# Allegro board ACU9EG.brd
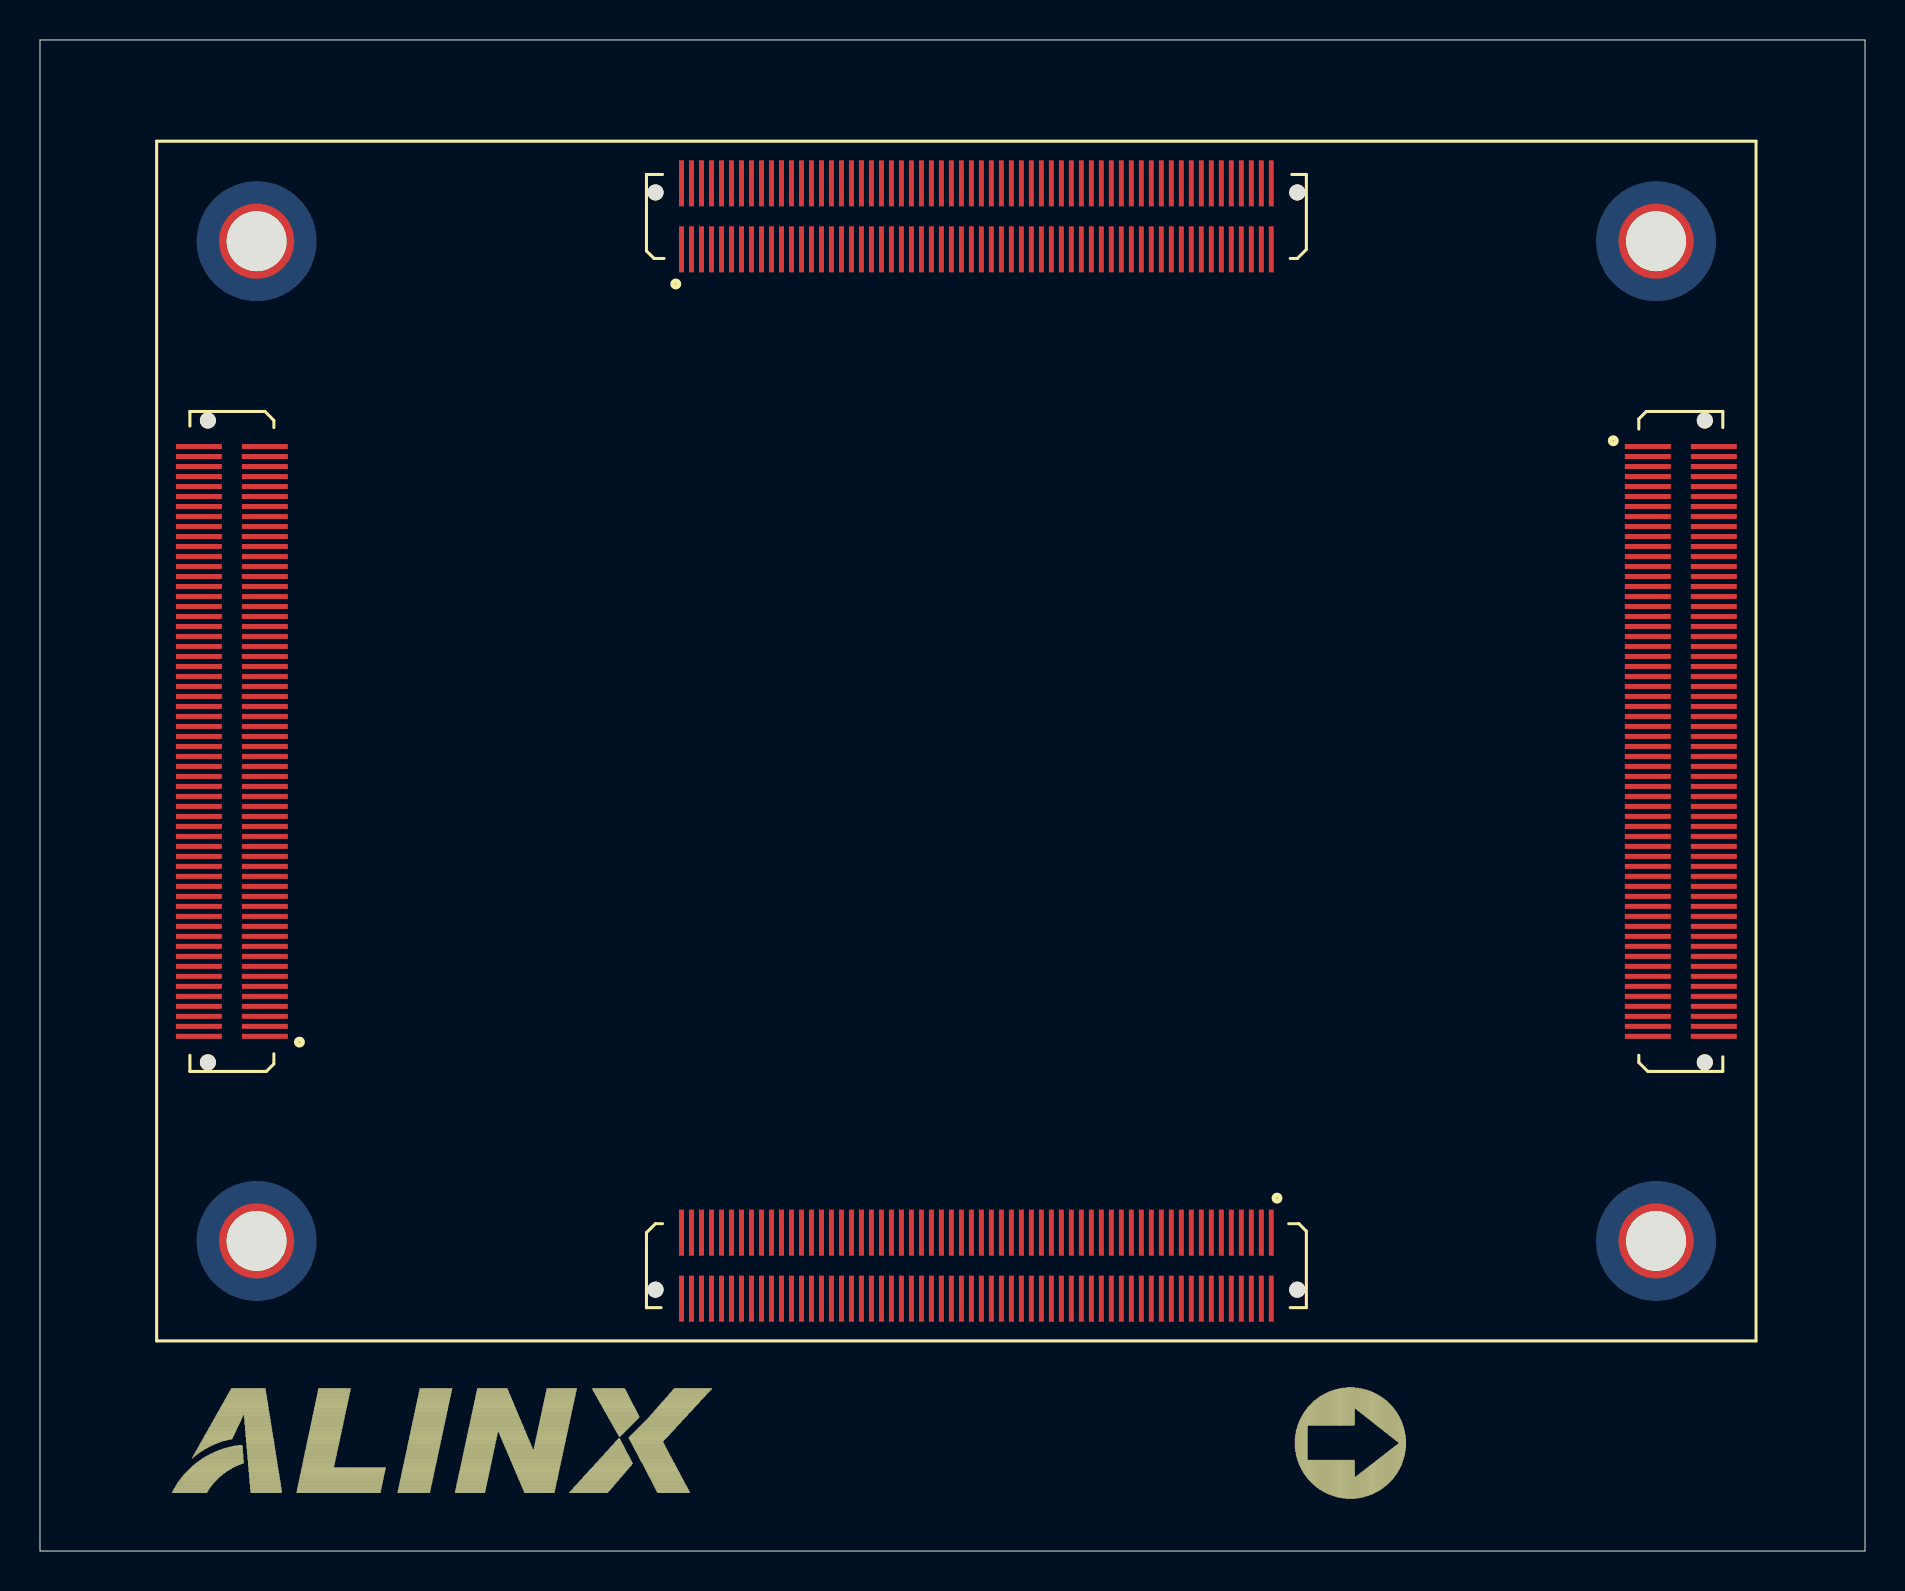
[diagram p0: board, top side]
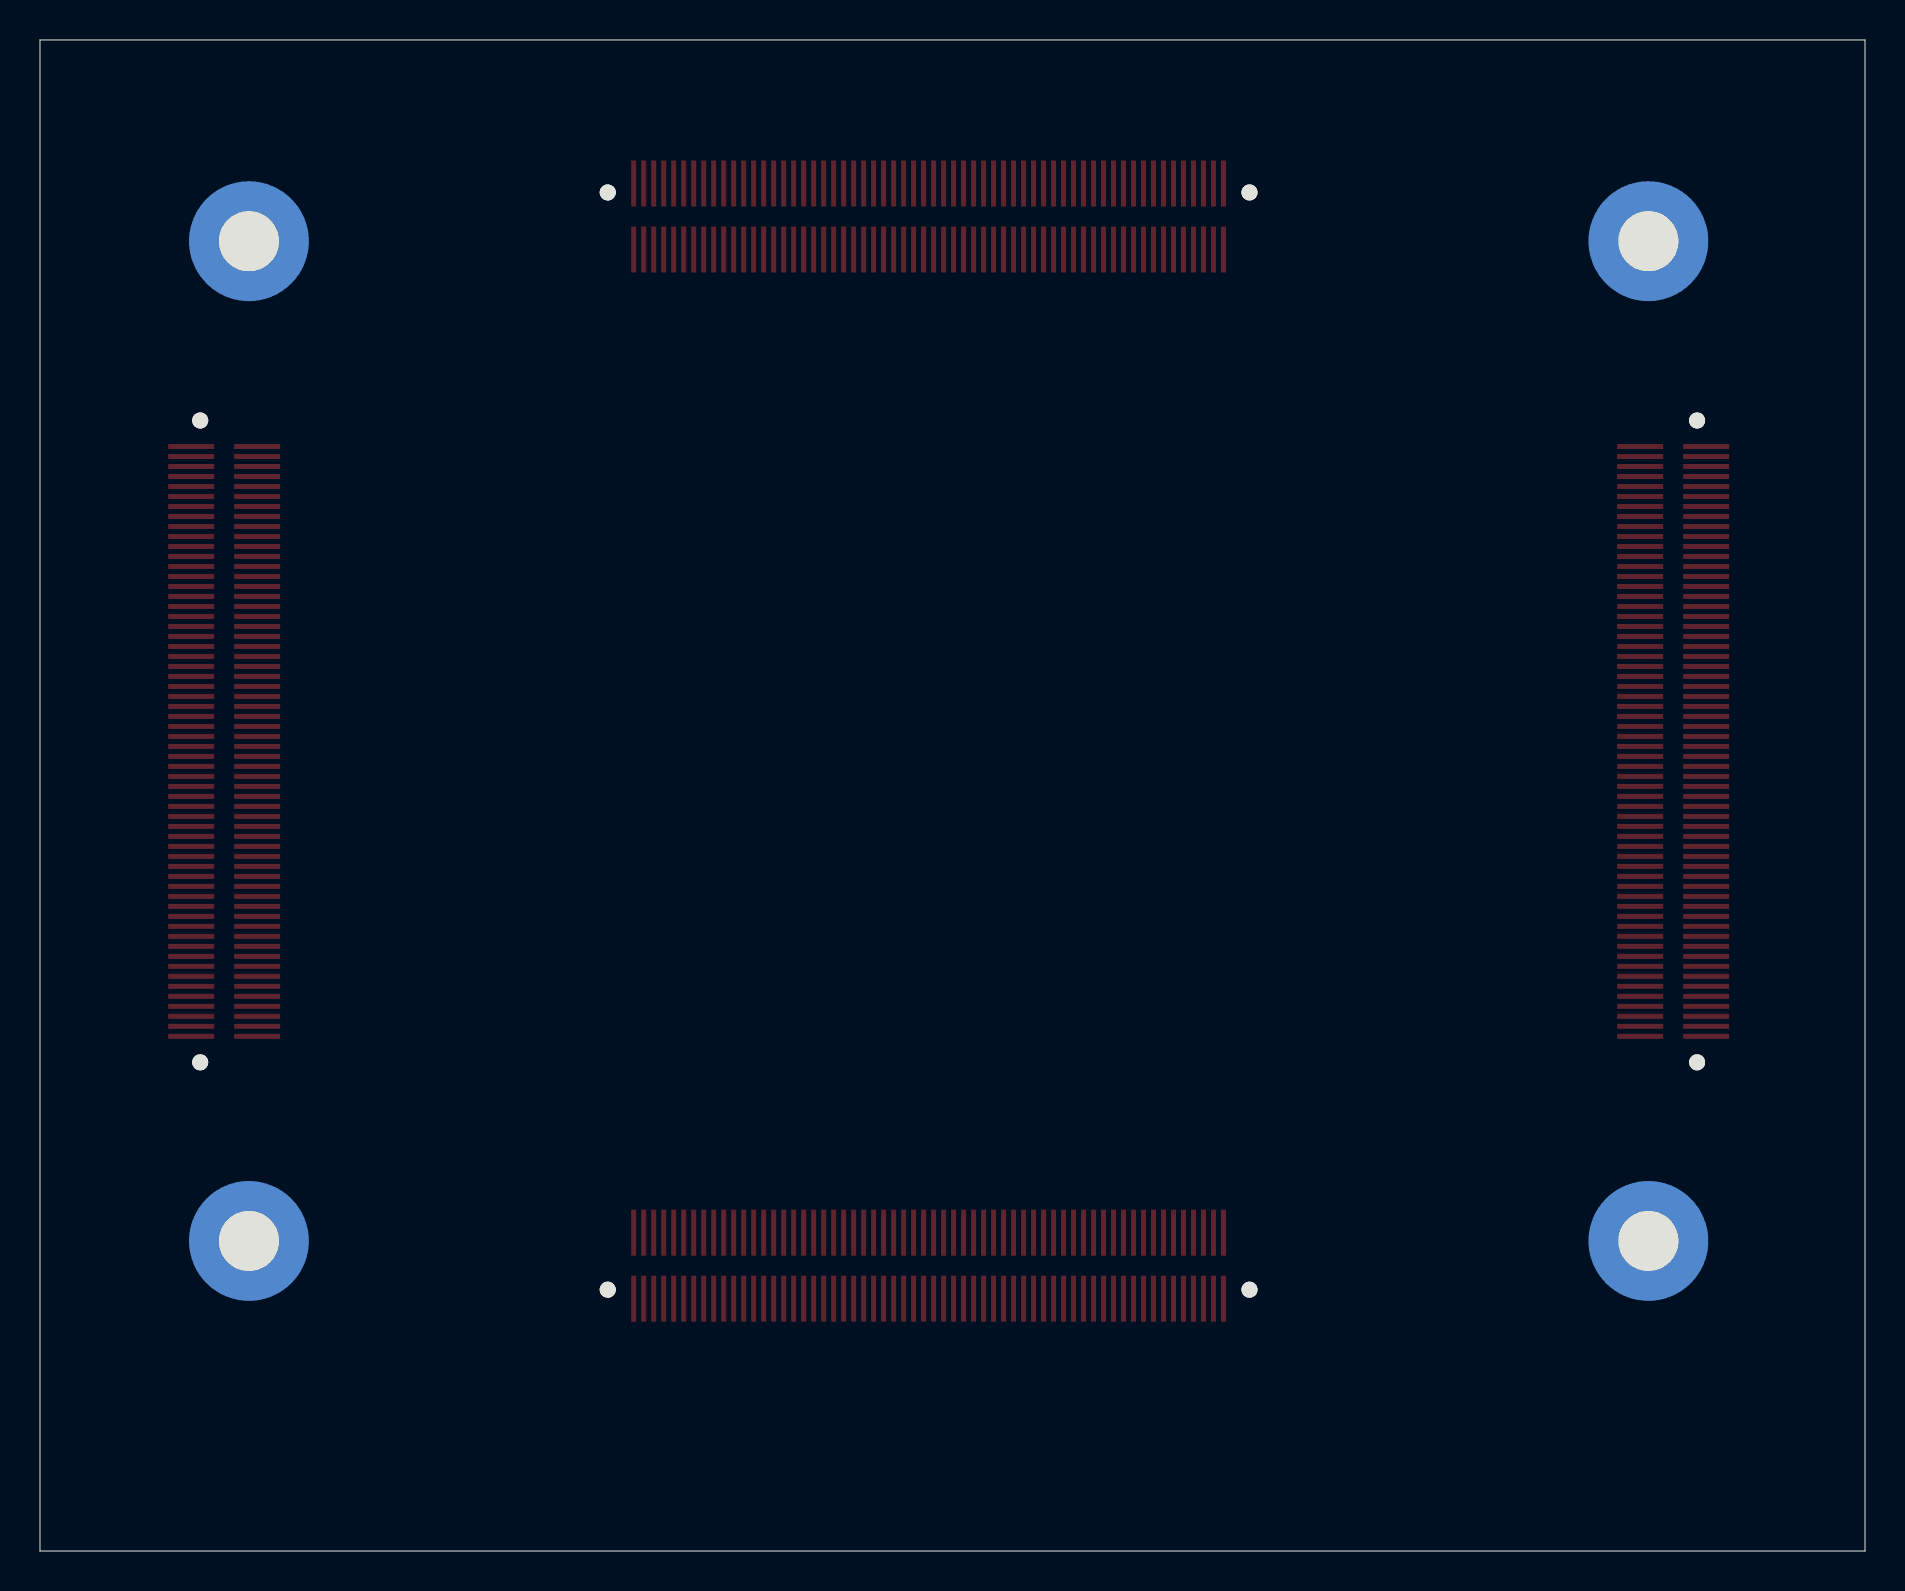
[diagram p1: board, bottom side, seen from below]

Outline 91.29 x 75.57 mm; copper layers: TOP, L2_GND, L3, L4_GND, L5_POW, L6, L7_GND, BOTTOM. Coordinates in mm from the lower left corner of the outline.
Outline path: 0,75.57 0,0 91.29,0 91.29,75.57 0,75.57

## Design rules (mm)
constraint set DEFAULT: min track width 0.114
net group 128_CLK0: nets 128_CLK0_N 128_CLK0_P
net group 128_RX0_: nets 128_RX3_N 128_RX3_P
net group 485_1: nets 485_A1 485_B1
net group 505_DP_CLK: nets 505_DP_CLKN 505_DP_CLKP
net group 505_PCIE_REFCLK_: nets 505_PCIE_REFCLK_N 505_PCIE_REFCLK_P
net group 505_USB_CLK: nets 505_USB_CLKN 505_USB_CLKP
net group DIFFPAIR47: nets TXN_DS3_C TXP_DS3_C
net group DIFFPAIR51: nets RX_DS3_N RX_DS3_P
net group DIFFPAIR53: nets RX_DS1_N RX_DS1_P
net group DIFFPAIR54: nets RX_DS4_N RX_DS4_P
net group DIFFPAIR56: nets RX_DS2_N RX_DS2_P
net group DIFFPAIR71: nets N16921766 N16921769
net group DPAUX_: nets DPAUX_N DPAUX_P
net group FMC_CLK0_: nets FMC_CLK0_N FMC_CLK0_P
net group FMC_CLK1_: nets FMC_CLK1_N FMC_CLK1_P
net group FMC_DP0_C2M_: nets FMC_DP0_C2M_N FMC_DP0_C2M_P
net group FMC_DP0_M2C_: nets FMC_DP0_M2C_N FMC_DP0_M2C_P
net group FMC_DP1_C2M: nets FMC_DP1_C2M_N FMC_DP1_C2M_P
net group FMC_DP1_M2C: nets FMC_DP1_M2C_N FMC_DP1_M2C_P
net group FMC_DP2_C2M: nets FMC_DP2_C2M_N FMC_DP2_C2M_P
net group FMC_DP2_M2C: nets FMC_DP2_M2C_N FMC_DP2_M2C_P
net group FMC_DP3_C2M: nets FMC_DP3_C2M_N FMC_DP3_C2M_P
net group FMC_DP3_M2C: nets FMC_DP3_M2C_N FMC_DP3_M2C_P
net group FMC_DP4_C2M: nets FMC_DP4_C2M_N FMC_DP4_C2M_P
net group FMC_DP4_M2C: nets FMC_DP4_M2C_N FMC_DP4_M2C_P
net group FMC_DP5_C2M: nets FMC_DP5_C2M_N FMC_DP5_C2M_P
net group FMC_DP5_M2C: nets FMC_DP5_M2C_N FMC_DP5_M2C_P
net group FMC_DP6_C2M: nets FMC_DP6_C2M_N FMC_DP6_C2M_P
net group FMC_DP6_M2C: nets FMC_DP6_M2C_N FMC_DP6_M2C_P
net group FMC_DP7_C2M: nets FMC_DP7_C2M_N FMC_DP7_C2M_P
net group FMC_DP7_M2C: nets FMC_DP7_M2C_N FMC_DP7_M2C_P
net group FMC_GBTCLK0_M2C_: nets FMC_GBTCLK0_M2C_N FMC_GBTCLK0_M2C_P
net group FMC_GBTCLK1_M2C: nets FMC_GBTCLK1_M2C_N FMC_GBTCLK1_M2C_P
net group FMC_LA00_CC_: nets FMC_LA00_CC_N FMC_LA00_CC_P
net group FMC_LA01_CC_: nets FMC_LA01_CC_N FMC_LA01_CC_P
net group FMC_LA02_: nets FMC_LA02_N FMC_LA02_P
net group FMC_LA03_: nets FMC_LA03_N FMC_LA03_P
net group FMC_LA04_: nets FMC_LA04_N FMC_LA04_P
net group FMC_LA05_: nets FMC_LA05_N FMC_LA05_P
net group FMC_LA06_: nets FMC_LA06_N FMC_LA06_P
net group FMC_LA07_: nets FMC_LA07_N FMC_LA07_P
net group FMC_LA08_: nets FMC_LA08_N FMC_LA08_P
net group FMC_LA09_: nets FMC_LA09_N FMC_LA09_P
net group FMC_LA10_: nets FMC_LA10_N FMC_LA10_P
net group FMC_LA11_: nets FMC_LA11_N FMC_LA11_P
net group FMC_LA12_: nets FMC_LA12_N FMC_LA12_P
net group FMC_LA13_: nets FMC_LA13_N FMC_LA13_P
net group FMC_LA14_: nets FMC_LA14_N FMC_LA14_P
net group FMC_LA15_: nets FMC_LA15_N FMC_LA15_P
net group FMC_LA16_: nets FMC_LA16_N FMC_LA16_P
net group FMC_LA17_CC_: nets FMC_LA17_CC_N FMC_LA17_CC_P
net group FMC_LA18_CC_: nets FMC_LA18_CC_N FMC_LA18_CC_P
net group FMC_LA19_: nets FMC_LA19_N FMC_LA19_P
net group FMC_LA20_: nets FMC_LA20_N FMC_LA20_P
net group FMC_LA21_: nets FMC_LA21_N FMC_LA21_P
net group FMC_LA22_: nets FMC_LA22_N FMC_LA22_P
net group FMC_LA23_: nets FMC_LA23_N FMC_LA23_P
net group FMC_LA24_: nets FMC_LA24_N FMC_LA24_P
net group FMC_LA25_: nets FMC_LA25_N FMC_LA25_P
net group FMC_LA26_: nets FMC_LA26_N FMC_LA26_P
net group FMC_LA27_: nets FMC_LA27_N FMC_LA27_P
net group FMC_LA28_: nets FMC_LA28_N FMC_LA28_P
net group FMC_LA29_: nets FMC_LA29_N FMC_LA29_P
net group FMC_LA30_: nets FMC_LA30_N FMC_LA30_P
net group FMC_LA31_: nets FMC_LA31_N FMC_LA31_P
net group FMC_LA32_: nets FMC_LA32_N FMC_LA32_P
net group FMC_LA33_: nets FMC_LA33_N FMC_LA33_P
net group GT0_DP_TX_: nets GT0_DP_TX_N GT0_DP_TX_P
net group GT0_DP_TX_C_: nets GT0_DP_TX_C_N GT0_DP_TX_C_P
net group GT1_DP_TX_: nets GT1_DP_TX_N GT1_DP_TX_P
net group GT1_DP_TX_C: nets GT1_DP_TX_C_N GT1_DP_TX_C_P
net group IO_1: nets IO_1N IO_1P
net group IO_2: nets IO_2N IO_2P
net group IO_3: nets IO_3N IO_3P
net group IO_4: nets IO_4N IO_4P
net group IO_5: nets IO_5N IO_5P
net group IO_6: nets IO_6N IO_6P
net group IO_7: nets IO_7N IO_7P
net group IO_8: nets IO_8N IO_8P
net group IO_9: nets IO_9N IO_9P
net group IO_10: nets IO_10N IO_10P
net group IO_11: nets IO_11N IO_11P
net group IO_12: nets IO_12N IO_12P
net group IO_13: nets IO_13N IO_13P
net group IO_14: nets IO_14N IO_14P
net group IO_15: nets IO_15N IO_15P
net group IO_16: nets IO_16N IO_16P
net group IO_17: nets IO_17N IO_17P
net group MIPI_CLK: nets MIPI_CLK_N MIPI_CLK_P
net group MIPI_LAN0: nets MIPI_LAN0_N MIPI_LAN0_P
net group MIPI_LAN1: nets MIPI_LAN1_N MIPI_LAN1_P
net group PCIE_REFCLK_: nets PCIE_REFCLK_N PCIE_REFCLK_P
net group PCIE_RX_: nets PCIE_RX_N PCIE_RX_P
net group PCIE_TX_: nets PCIE_TX_N PCIE_TX_P
net group PCIE_TX_C: nets PCIE_TX_C_N PCIE_TX_C_P
net group SATA1_RX: nets SATA1_RX_N SATA1_RX_P
net group SATA1_RX_C: nets SATA1_RX_C_N SATA1_RX_C_P
net group SATA1_TX: nets SATA1_TX_N SATA1_TX_P
net group SATA1_TX_C: nets SATA1_TX_C_N SATA1_TX_C_P
net group SATA2_RX: nets SATA2_RX_N SATA2_RX_P
net group SATA2_RX_C: nets SATA2_RX_C_N SATA2_RX_C_P
net group SATA2_TX: nets SATA2_TX_N SATA2_TX_P
net group SATA2_TX_C: nets SATA2_TX_C_N SATA2_TX_C_P
net group SFP1_RX: nets SFP1_RX_N SFP1_RX_P
net group SFP1_TX: nets SFP1_TX_N SFP1_TX_P
net group SFP2_RX: nets SFP2_RX_N SFP2_RX_P
net group SFP2_TX: nets SFP2_TX_N SFP2_TX_P
net group SFP_CLK: nets SFP_CLK_N SFP_CLK_P
net group SMA1_RX: nets SMA1_RX_N SMA1_RX_P
net group SMA_TX: nets SMA1_TX_N SMA1_TX_P
net group TX_DS3: nets TX_DS3_N TX_DS3_P
net group TXN_DS1_C: nets TX_DS1_N TXN_DS1_C
net group TXN_DS2_C: nets TX_DS2_N TXN_DS2_C
net group TXN_DS4_C: nets TX_DS4_N TXN_DS4_C
net group TXP_DS1_C: nets TX_DS1_P TXP_DS1_C
net group TXP_DS2_C: nets TX_DS2_P TXP_DS2_C
net group TXP_DS4_C: nets TX_DS4_P TXP_DS4_C
net group UART1: nets N18754903 N18754905
net group USB: nets USB_DM USB_DP
net group USB_RXN_UP: nets USB_RXN_UP USB_SSRXN
net group USB_RXP_UP: nets USB_RXP_UP USB_SSRXP
net group USB_SSTX: nets USB_SSTXN USB_SSTXP
net group USB_TX_UP: nets USB_TXN_UP USB_TXP_UP
net group X3: nets N18737519 N18737521
net group Y1: nets N17149050 N17149056
net group Y4: nets N25113178 N25113180
net group 15: nets JTAG_TCK
net group ETH_RX: nets PHY1_RXCK PHY1_RXCTL PHY1_RXD0 PHY1_RXD1 PHY1_RXD2 PHY1_RXD3 PHY2_RXCK PHY2_RXCTL PHY2_RXD0 PHY2_RXD1 PHY2_RXD2 PHY2_RXD3
net group ETH_TX: nets PHY1_TXCK PHY1_TXCTL PHY1_TXD0 PHY1_TXD1 PHY1_TXD2 PHY1_TXD3 PHY2_TXCK PHY2_TXCTL PHY2_TXD0 PHY2_TXD1 PHY2_TXD2 PHY2_TXD3
net group GND: nets GND
net group OTG_DATA: nets USB_CLK USB_DATA0 USB_DATA1 USB_DATA2 USB_DATA3 USB_DATA4 USB_DATA5 USB_DATA6 USB_DATA7 USB_DIR USB_NXT USB_STP
net group PHY_MDI: nets PHY1_MDI0_N PHY1_MDI0_P PHY1_MDI1_N PHY1_MDI1_P PHY1_MDI2_N PHY1_MDI2_P PHY1_MDI3_N PHY1_MDI3_P PHY2_MDI0_N PHY2_MDI0_P PHY2_MDI1_N PHY2_MDI1_P PHY2_MDI2_N PHY2_MDI2_P PHY2_MDI3_N PHY2_MDI3_P

## Placement (name value [footprint] x y rotation side)
J29  -  [AXK6A2337YG]  82.07 40.49 270 top
J30  -  [AXK6A2337YG]  46.84 14.27 180 top
J31  -  [AXK6A2337YG]  46.84 66.75 0 top
J32  -  [AXK6A2337YG]  9.6 40.49 90 top
NOREF  -  []  -92.45 -4.07 0 top
NOREF#2  -  []  32.51 226.04 0 top
NOREF#3  -  []  -85.52 -7.36 90 top
NOREF#4  -  []  -68.95 234.09 0 top
NOREF#5  -  []  -86.61 192.51 0 top
NOREF#6  -  []  87.51 195.96 0 top
NOREF#7  -  []  -89.42 -14.46 90 top
NOREF#8  -  [unnamed#2]  45.84 40.51 180 top

## Library data of the parts
J29-J32 = CONN SOCKET 60x2_0

## Footprints (pads in the part's own frame, mm; a bottom-side part is the same pattern mirrored in y, then rotated)
AXK6A2337YG
  round 0.8 hole 0.8 unplated: (-16.05,1.2) (16.05,1.2)
  rect 0.25x2.3 smd: 1(-14.75,-1.65) 2(-14.75,1.65) 3(-14.25,-1.65) 4(-14.25,1.65) 5(-13.75,-1.65) 6(-13.75,1.65) 7(-13.25,-1.65) 8(-13.25,1.65) 9(-12.75,-1.65) 10(-12.75,1.65) 11(-12.25,-1.65) 12(-12.25,1.65) 13(-11.75,-1.65) 14(-11.75,1.65) 15(-11.25,-1.65) 16(-11.25,1.65) 17(-10.75,-1.65) 18(-10.75,1.65) 19(-10.25,-1.65) 20(-10.25,1.65) 21(-9.75,-1.65) 22(-9.75,1.65) 23(-9.25,-1.65) 24(-9.25,1.65) 25(-8.75,-1.65) 26(-8.75,1.65) 27(-8.25,-1.65) 28(-8.25,1.65) 29(-7.75,-1.65) 30(-7.75,1.65) 31(-7.25,-1.65) 32(-7.25,1.65) 33(-6.75,-1.65) 34(-6.75,1.65) 35(-6.25,-1.65) 36(-6.25,1.65) 37(-5.75,-1.65) 38(-5.75,1.65) 39(-5.25,-1.65) 40(-5.25,1.65) 41(-4.75,-1.65) 42(-4.75,1.65) 43(-4.25,-1.65) 44(-4.25,1.65) 45(-3.75,-1.65) 46(-3.75,1.65) 47(-3.25,-1.65) 48(-3.25,1.65) 49(-2.75,-1.65) 50(-2.75,1.65) 51(-2.25,-1.65) 52(-2.25,1.65) 53(-1.75,-1.65) 54(-1.75,1.65) 55(-1.25,-1.65) 56(-1.25,1.65) 57(-0.75,-1.65) 58(-0.75,1.65) 59(-0.25,-1.65) 60(-0.25,1.65) 61(0.25,-1.65) 62(0.25,1.65) 63(0.75,-1.65) 64(0.75,1.65) 65(1.25,-1.65) 66(1.25,1.65) 67(1.75,-1.65) 68(1.75,1.65) 69(2.25,-1.65) 70(2.25,1.65) 71(2.75,-1.65) 72(2.75,1.65) 73(3.25,-1.65) 74(3.25,1.65) 75(3.75,-1.65) 76(3.75,1.65) 77(4.25,-1.65) 78(4.25,1.65) 79(4.75,-1.65) 80(4.75,1.65) 81(5.25,-1.65) 82(5.25,1.65) 83(5.75,-1.65) 84(5.75,1.65) 85(6.25,-1.65) 86(6.25,1.65) 87(6.75,-1.65) 88(6.75,1.65) 89(7.25,-1.65) 90(7.25,1.65) 91(7.75,-1.65) 92(7.75,1.65) 93(8.25,-1.65) 94(8.25,1.65) 95(8.75,-1.65) 96(8.75,1.65) 97(9.25,-1.65) 98(9.25,1.65) 99(9.75,-1.65) 100(9.75,1.65) 101(10.25,-1.65) 102(10.25,1.65) 103(10.75,-1.65) 104(10.75,1.65) 105(11.25,-1.65) 106(11.25,1.65) 107(11.75,-1.65) 108(11.75,1.65) 109(12.25,-1.65) 110(12.25,1.65) 111(12.75,-1.65) 112(12.75,1.65) 113(13.25,-1.65) 114(13.25,1.65) 115(13.75,-1.65) 116(13.75,1.65) 117(14.25,-1.65) 118(14.25,1.65) 119(14.75,-1.65) 120(14.75,1.65)
unnamed#2
  round 3.759 hole 3: 1(-35,25) 2(35,25) 3(-35,-25) 4(35,-25)

## Nets
+1.8V: J30.103(52) J30.104(112) J30.105(53) J30.106(113)
+12V: J30.109(55) J30.110(115) J30.111(56) J30.112(116) J30.113(57) J30.114(117) J30.115(58) J30.116(118) J30.117(59) J30.118(119) J30.119(60) J30.120
GND: J29.11(6) J29.12(66) J29.21(11) J29.22(71) J29.31(16) J29.32(76) J29.41(21) J29.42(81) J29.51(26) J29.52(86) J29.61(31) J29.62(91) J29.71(36) J29.72(96) J29.81(41) J29.82(101) J29.91(46) J29.92(106) J29.97(49) J29.98(109) J29.103(52) J29.104(112) J29.109(55) J29.110(115) J29.115(58) J29.116(118) J30.5(3) J30.6(63) J30.11(6) J30.12(66) J30.17(9) J30.18(69) J30.23(12) J30.24(72) J30.29(15) J30.30(75) J30.35(18) J30.36(78) J30.41(21) J30.42(81) J30.51(26) J30.52(86) J30.61(31) J30.62(91) J30.71(36) J30.72(96) J30.81(41) J30.82(101) J30.91(46) J30.92(106) J30.101(51) J30.102(111) J30.107(54) J30.108(114) J31.9(5) J31.10(65) J31.19(10) J31.20(70) J31.29(15) J31.30(75) J31.39(20) J31.40(80) J31.49(25) J31.50(85) J31.59(30) J31.60(90) J31.69(35) J31.70(95) J31.79(40) J31.80(100) J31.89(45) J31.90(105) J31.99(50) J31.100(110) J31.109(55) J31.110(115) J31.119(60) J31.120 J32.9(5) J32.10(65) J32.19(10) J32.20(70) J32.31(16) J32.32(76) J32.37(19) J32.38(79) J32.43(22) J32.44(82) J32.49(25) J32.50(85) J32.55(28) J32.56(88) J32.61(31) J32.62(91) J32.67(34) J32.68(94) J32.73(37) J32.74(97) J32.79(40) J32.80(100) J32.85(43) J32.86(103) J32.91(46) J32.92(106) J32.97(49) J32.98(109) J32.103(52) J32.104(112) J32.109(55) J32.110(115) J32.115(58) J32.116(118)
VBAT_IN: J31.12(66)
128_CLK0_N: J32.117(59)
128_CLK0_P: J32.119(60)
128_CLK1_N: J32.120
128_CLK1_P: J32.118(119)
128_RX1_N: J32.102(111)
128_RX1_P: J32.100(110)
128_RX2_N: J32.114(117)
128_RX2_P: J32.112(116)
128_RX3_N: J32.94(107)
128_RX3_P: J32.96(108)
128_TX1_N: J32.111(56)
128_TX1_P: J32.113(57)
128_TX2_N: J32.99(50)
128_TX2_P: J32.101(51)
128_TX3_N: J32.93(47)
128_TX3_P: J32.95(48)
129_CLK1_N: J32.88(104)
129_CLK1_P: J32.90(105)
130_CLK1_N: J32.58(89)
130_CLK1_P: J32.60(90)
228_CLK1_N: J29.118(119)
228_CLK1_P: J29.120
505_CLK3_N: J30.33(17)
505_CLK3_P: J30.31(16)
505_DP_CLKN: J30.22(71)
505_DP_CLKP: J30.20(70)
505_PCIE_REFCLK_N: J30.4(62)
505_PCIE_REFCLK_P: J30.2(61)
505_RX2_N: J30.19(10)
505_RX2_P: J30.21(11)
505_RX3_N: J30.27(14)
505_RX3_P: J30.25(13)
505_USB_CLKN: J30.15(8)
505_USB_CLKP: J30.13(7)
B44_L8_N: J31.38(79)
B44_L8_P: J31.36(78)
B44_L9_N: J31.66(93)
B44_L9_P: J31.68(94)
B50_L6_N: J31.74(97)
B50_L6_P: J31.72(96)
B50_L10_N: J31.32(76)
B50_L10_P: J31.34(77)
B67_L6_N: J29.30(75)
B67_L6_P: J29.28(74)
CAM_CLK: J31.44(82)
CAM_GPIO: J31.42(81)
CAM_SCL: J31.46(83)
CAM_SDA: J31.48(84)
DP_AUX_IN_MIO30: J30.55(28)
DP_AUX_OUT_MIO27: J30.49(25)
DP_HPD_MIO28: J30.43(22)
DP_OE_MIO29: J30.59(30)
FAN_PWM: J31.84(102)
FMC_CLK0_N: J29.90(105)
FMC_CLK0_P: J29.88(104)
FMC_CLK1_N: J29.56(88)
FMC_CLK1_P: J29.54(87)
FMC_DP0_C2M_N: J32.51(26)
FMC_DP0_C2M_P: J32.53(27)
FMC_DP0_M2C_N: J32.45(23)
FMC_DP0_M2C_P: J32.47(24)
FMC_DP1_C2M_N: J32.52(86)
FMC_DP1_C2M_P: J32.54(87)
FMC_DP1_M2C_N: J32.46(83)
FMC_DP1_M2C_P: J32.48(84)
FMC_DP2_C2M_N: J32.34(77)
FMC_DP2_C2M_P: J32.36(78)
FMC_DP2_M2C_N: J32.40(80)
FMC_DP2_M2C_P: J32.42(81)
FMC_DP3_C2M_N: J32.39(20)
FMC_DP3_C2M_P: J32.41(21)
FMC_DP3_M2C_N: J32.33(17)
FMC_DP3_M2C_P: J32.35(18)
FMC_DP4_C2M_N: J32.82(101)
FMC_DP4_C2M_P: J32.84(102)
FMC_DP4_M2C_N: J32.81(41)
FMC_DP4_M2C_P: J32.83(42)
FMC_DP5_C2M_N: J32.75(38)
FMC_DP5_C2M_P: J32.77(39)
FMC_DP5_M2C_N: J32.69(35)
FMC_DP5_M2C_P: J32.71(36)
FMC_DP6_C2M_N: J32.70(95)
FMC_DP6_C2M_P: J32.72(96)
FMC_DP6_M2C_N: J32.76(98)
FMC_DP6_M2C_P: J32.78(99)
FMC_DP7_C2M_N: J32.63(32)
FMC_DP7_C2M_P: J32.65(33)
FMC_DP7_M2C_N: J32.64(92)
FMC_DP7_M2C_P: J32.66(93)
FMC_GBTCLK0_M2C_N: J32.57(29)
FMC_GBTCLK0_M2C_P: J32.59(30)
FMC_GBTCLK1_M2C_N: J32.87(44)
FMC_GBTCLK1_M2C_P: J32.89(45)
FMC_HDMI_SCL: J31.83(42)
FMC_HDMI_SDA: J31.81(41)
FMC_LA00_CC_N: J29.86(103)
FMC_LA00_CC_P: J29.84(102)
FMC_LA01_CC_N: J29.76(98)
FMC_LA01_CC_P: J29.74(97)
FMC_LA02_N: J29.89(45)
FMC_LA02_P: J29.87(44)
FMC_LA03_N: J29.85(43)
FMC_LA03_P: J29.83(42)
FMC_LA04_N: J29.67(34)
FMC_LA04_P: J29.69(35)
FMC_LA05_N: J29.66(93)
FMC_LA05_P: J29.64(92)
FMC_LA06_N: J29.70(95)
FMC_LA06_P: J29.68(94)
FMC_LA07_N: J29.45(23)
FMC_LA07_P: J29.43(22)
FMC_LA08_N: J29.65(33)
FMC_LA08_P: J29.63(32)
FMC_LA09_N: J29.73(37)
FMC_LA09_P: J29.75(38)
FMC_LA10_N: J29.60(90)
FMC_LA10_P: J29.58(89)
FMC_LA11_N: J29.79(40)
FMC_LA11_P: J29.77(39)
FMC_LA12_N: J29.48(84)
FMC_LA12_P: J29.50(85)
FMC_LA13_N: J29.33(17)
FMC_LA13_P: J29.35(18)
FMC_LA14_N: J29.44(82)
FMC_LA14_P: J29.46(83)
FMC_LA15_N: J29.49(25)
FMC_LA15_P: J29.47(24)
FMC_LA16_N: J29.29(15)
FMC_LA16_P: J29.27(14)
FMC_LA17_CC_N: J29.34(77)
FMC_LA17_CC_P: J29.36(78)
FMC_LA18_CC_N: J29.24(72)
FMC_LA18_CC_P: J29.26(73)
FMC_LA19_N: J29.40(80)
FMC_LA19_P: J29.38(79)
FMC_LA20_N: J29.78(99)
FMC_LA20_P: J29.80(100)
FMC_LA21_N: J29.53(27)
FMC_LA21_P: J29.55(28)
FMC_LA22_N: J29.39(20)
FMC_LA22_P: J29.37(19)
FMC_LA23_N: J29.57(29)
FMC_LA23_P: J29.59(30)
FMC_LA24_N: J29.16(68)
FMC_LA24_P: J29.14(67)
FMC_LA25_N: J29.13(7)
FMC_LA25_P: J29.15(8)
FMC_LA26_N: J29.25(13)
FMC_LA26_P: J29.23(12)
FMC_LA27_N: J29.18(69)
FMC_LA27_P: J29.20(70)
FMC_LA28_N: J29.9(5)
FMC_LA28_P: J29.7(4)
FMC_LA29_N: J29.10(65)
FMC_LA29_P: J29.8(64)
FMC_LA30_N: J31.96(108)
FMC_LA30_P: J31.98(109)
FMC_LA31_N: J29.5(3)
FMC_LA31_P: J29.3(2)
FMC_LA32_N: J31.102(111)
FMC_LA32_P: J31.104(112)
FMC_LA33_N: J31.94(107)
FMC_LA33_P: J31.92(106)
FMC_PRSNT: J31.87(44)
FPGA_DONE: J31.16(68)
FPGA_TDO: J31.6(63)
GT0_DP_TX_N: J30.10(65)
GT0_DP_TX_P: J30.8(64)
GT1_DP_TX_N: J30.16(68)
GT1_DP_TX_P: J30.14(67)
IO_1N: J32.3(2)
IO_1P: J32.1
IO_2N: J32.2(61)
IO_2P: J32.4(62)
IO_3N: J32.7(4)
IO_3P: J32.5(3)
IO_4N: J32.6(63)
IO_4P: J32.8(64)
IO_5N: J32.11(6)
IO_5P: J32.13(7)
IO_6N: J32.12(66)
IO_6P: J32.14(67)
IO_7N: J32.16(68)
IO_7P: J32.18(69)
IO_8N: J32.15(8)
IO_8P: J32.17(9)
IO_9N: J32.26(73)
IO_9P: J32.28(74)
IO_10N: J31.41(21)
IO_10P: J31.43(22)
IO_11N: J31.33(17)
IO_11P: J31.31(16)
IO_12N: J31.27(14)
IO_12P: J31.25(13)
IO_13N: J31.23(12)
IO_13P: J31.21(11)
IO_14N: J31.37(19)
IO_14P: J31.35(18)
IO_15N: J31.45(23)
IO_15P: J31.47(24)
IO_16N: J31.22(71)
IO_16P: J31.24(72)
IO_17N: J31.28(74)
IO_17P: J31.26(73)
JTAG_TCK: J31.2(61)
JTAG_TDI: J31.8(64)
JTAG_TMS: J31.4(62)
MIPI_CLK_N: J29.6(63)
MIPI_CLK_P: J29.4(62)
MIPI_LAN0_N: J29.17(9)
MIPI_LAN0_P: J29.19(10)
MIPI_LAN1_N: J31.114(117)
MIPI_LAN1_P: J31.112(116)
PCIE_RSTN_MIO37: J30.45(23)
PCIE_RX_N: J30.9(5)
PCIE_RX_P: J30.7(4)
PCIE_TX_N: J30.3(2)
PCIE_TX_P: J30.1
PHY1_MDC: J30.68(94)
PHY1_MDIO: J30.70(95)
PHY1_RXCK: J30.100(110)
PHY1_RXCTL: J30.98(109)
PHY1_RXD0: J30.96(108)
PHY1_RXD1: J30.94(107)
PHY1_RXD2: J30.90(105)
PHY1_RXD3: J30.88(104)
PHY1_TXCK: J30.84(102)
PHY1_TXCTL: J30.86(103)
PHY1_TXD0: J30.74(97)
PHY1_TXD1: J30.76(98)
PHY1_TXD2: J30.78(99)
PHY1_TXD3: J30.80(100)
PHY2_MDC: J31.106(113)
PHY2_MDIO: J31.108(114)
PHY2_RESET: J31.118(119)
PHY2_RXCK: J31.95(48)
PHY2_RXCTL: J31.97(49)
PHY2_RXD0: J31.117(59)
PHY2_RXD1: J31.115(58)
PHY2_RXD2: J31.113(57)
PHY2_RXD3: J31.111(56)
PHY2_TXCK: J31.93(47)
PHY2_TXCTL: J31.91(46)
PHY2_TXD0: J31.107(54)
PHY2_TXD1: J31.105(53)
PHY2_TXD2: J31.103(52)
PHY2_TXD3: J31.101(51)
PL_485_DE1: J31.61(31)
PL_485_DE2: J31.78(99)
PL_485_RXD1: J31.57(29)
PL_485_RXD2: J31.76(98)
PL_485_TXD1: J31.63(32)
PL_485_TXD2: J31.82(101)
PL_KEY: J31.53(27)
PL_LED1: J31.55(28)
PL_LED2: J31.51(26)
PL_REF_CLK: J31.116(118)
PL_UART_RX: J31.86(103)
PL_UART_TX: J31.88(104)
POWER_SW: J31.3(2)
PS_CAN1_RX: J30.75(38)
PS_CAN1_TX: J30.47(24)
PS_CAN2_RX: J30.79(40)
PS_CAN2_TX: J30.53(27)
PS_ERROR_OUT: J31.17(9)
PS_ERROR_STATUS: J31.15(8)
PS_IIC_SCL_1V8: J30.57(29)
PS_IIC_SDA_1V8: J30.39(20)
PS_KEY: J30.73(37)
PS_LED: J30.83(42)
PS_MIO26: J30.37(19)
PS_MIO31: J30.63(32)
PS_MIO36: J30.69(35)
PS_MODE0: J31.13(7)
PS_MODE1: J31.11(6)
PS_MODE2: J31.7(4)
PS_MODE3: J31.5(3)
PS_POR_B: J31.14(67)
PS_UART_RX: J30.67(34)
PS_UART_TX: J30.77(39)
PWRGD: J31.85(43)
SATA1_RX_N: J29.93(47)
SATA1_RX_P: J29.95(48)
SATA1_TX_N: J29.99(50)
SATA1_TX_P: J29.101(51)
SATA2_RX_N: J29.105(53)
SATA2_RX_P: J29.107(54)
SATA2_TX_N: J29.111(56)
SATA2_TX_P: J29.113(57)
SD_CD: J30.85(43)
SD_CLK: J30.97(49)
SD_CMD: J30.99(50)
SD_D0: J30.87(44)
SD_D1: J30.93(47)
SD_D2: J30.95(48)
SD_D3: J30.89(45)
SFP1_LOSS: J31.67(34)
SFP1_RX_N: J29.106(113)
SFP1_RX_P: J29.108(114)
SFP1_TX_DIS: J31.65(33)
SFP1_TX_N: J29.112(116)
SFP1_TX_P: J29.114(117)
SFP2_LOSS: J31.73(37)
SFP2_RX_N: J29.94(107)
SFP2_RX_P: J29.96(108)
SFP2_TX_DIS: J31.71(36)
SFP2_TX_N: J29.100(110)
SFP2_TX_P: J29.102(111)
SFP_CLK_N: J29.117(59)
SFP_CLK_P: J29.119(60)
SMA1_RX_N: J32.108(114)
SMA1_RX_P: J32.106(113)
SMA1_TX_N: J32.105(53)
SMA1_TX_P: J32.107(54)
USB_CLK: J30.44(82)
USB_DATA0: J30.48(84)
USB_DATA1: J30.50(85)
USB_DATA2: J30.54(87)
USB_DATA3: J30.56(88)
USB_DATA4: J30.58(89)
USB_DATA5: J30.60(90)
USB_DATA6: J30.64(92)
USB_DATA7: J30.66(93)
USB_DIR: J30.40(80)
USB_NXT: J30.46(83)
USB_RESET_N: J30.65(33)
USB_SSRXN: J30.26(73)
USB_SSRXP: J30.28(74)
USB_SSTXN: J30.32(76)
USB_SSTXP: J30.34(77)
USB_STP: J30.38(79)

Pads without a net: J29 1 2; J31 1 18 52 54 56 58 62 64 75 77; J32 21 22 23 24 25 27 29 30; NOREF#8 1 2 3 4

## Text on the board
User.Comments: CR_UNNAMED1_3 | CR_UNNAMED00_1 | CR_33333_3 | CR_33333_2 | HI3536DMEB VER.B SOLDMASK TOP
DIMENSION: 2-open window: 79x118mil | Notes3: | Fro this PN,Soldermask should be covered at all required location | and no red soldermask(copper color) is allowed at BGA area. | Notes3 | HI3536DMEB VER.B DRILL CHART | 1--Gerber TOP | 2--GROUND PLANE02 | 3--POWER PLANE03 | 4--Gerber BOTTOM
DISPLAY_BOTTOM: HI3536DMEB VER.B PASTEMASK BOTTOM
DISPLAY_TOP: HI3536DMEB VER.B PASTEMASK TOP
User.7: LINE WITH IMPEDANCE CHART FOR REFERENCE | L8 | L1 | L4 | L2 | L7 | L5 | L3 | L6 | (GND) | SINGLE ENDED | 4.5mil | 50ohm | WIDTH | 4mil | (WIDTH/SPACE) | 3.5mil/6mil | DIFF-PAIR | 4mil/7mil | 100ohm | 4.5mil/5mil | 90ohm | -
User.26: FIGURE | SIZE | 8.0 | 19.69 | 27.56 | 29.13 | 35.0 | 36.0 | 40.0 | 42.0 | 43.31 | 47.24 | 51.18 | 55.12 | 62.0 | 70.87 | 90.55 | 106.0 | 118.11 | 125.0 | 31.5 | 43.0 | 51.0 | 53.15 | 63.0 | 129.92 | 55.12x23.62 | 62.0x39.37 | 74.8x31.5 | 78.74x27.56 | 102.36x31.5 | DRILL CHART: TOP to BOTTOM | ALL UNITS ARE IN MILS | TOLERANCE | +0.0/-0.0 | +3.0/-3.0 | PLATED | NON-PLATED | QTY | 1674 | 10 | 36 | 14 | 40 | 6 | 2 | 3 | 20 | 12 | 4 | 8 | 30 | 1
